# Altium PCB LM331MCU.PcbDoc
Units mil, origin at the board's own origin, x right, y up, seen from the top; angles counter-clockwise.
Board outline 6000 x 4000 mil, 2 copper layers (Top Layer, Bottom Layer); 22 components, 12 nets, 71 pads, 0 vias.
Unrouted connection lines stored in the file: 1.
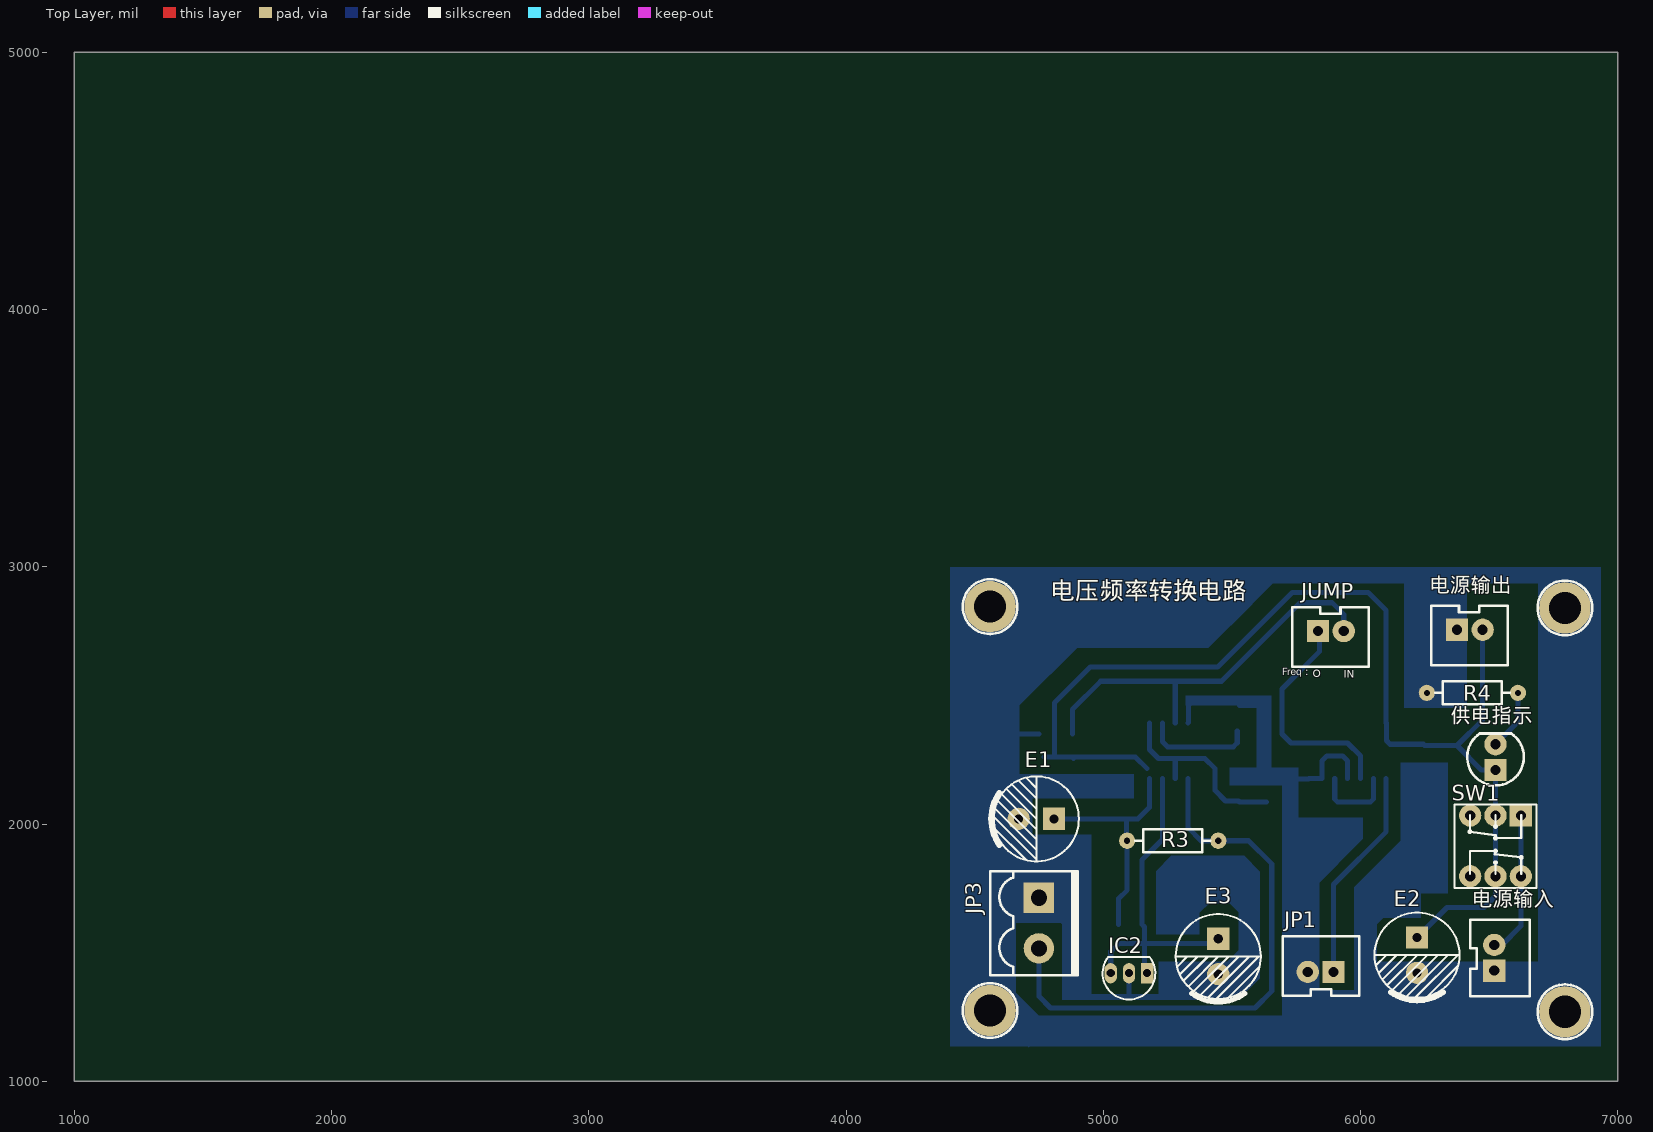
[diagram p0: Top Layer view]
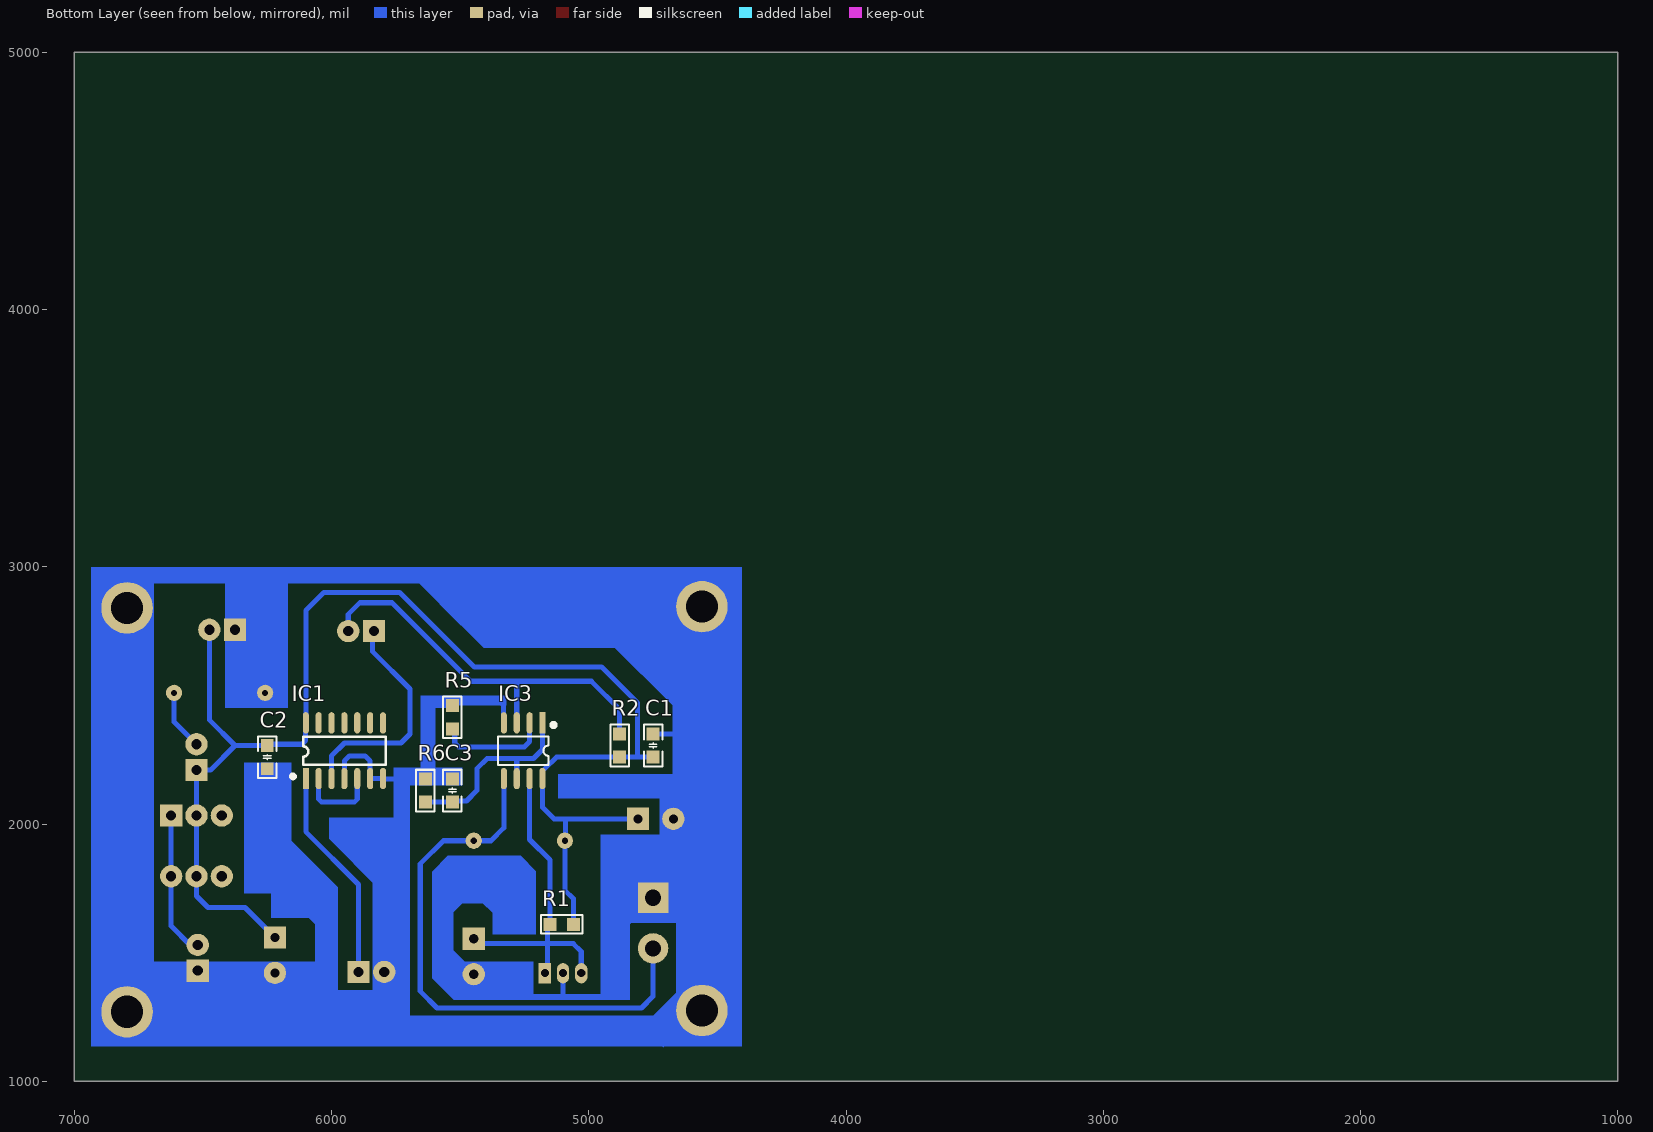
[diagram p1: Bottom Layer view, seen from below]

## Layer stack, top to bottom
Top Solder: solder mask 0.4, Solder Resist, Dk 3.5
Top Layer: signal copper 1.4
Dielectric 1: dielectric 12.6, FR-4, Dk 4.8
Bottom Layer: signal copper 1.4
Bottom Solder: solder mask 0.4, Solder Resist, Dk 3.5

## Board outline
1000,1000 7000,1000 7000,5000 1000,5000

## Design rules (kind name [scope] priority, off if disabled: settings)
Clearance [All] p1: gap=10 ignorepadtopadclearanceinfootprint=FALSE except(0: Arc-Hole Track-Hole SMDPad-Hole THPad-Hole Via-Hole Fill-Hole Poly-Hole Region-Hole Text-Hole)
PolygonConnect [All] p1: connectstyle=Relief reliefconductorwidth=10 reliefentries=4 polygonreliefangle="90 Angle" airgapwidth=10
RoutingVias [All] p1: holewidth=28 width=50 viastyle="Through Hole" minholewidth=28 minwidth=50 maxholewidth=28 maxwidth=50
SolderMaskExpansion [All] p1: expansion=4
Width [All] p1: maxlimit=39.37 minlimit=10 preferedwidth=31.5 toplayer_maxwidth=10 toplayer_prefwidth=10 bottomlayer_minwidth=19.68 minimp=50.000000 maximp=50.000000 favimp=50.000000
30 further rules are at their usual default settings.

## Components (designator, comment, footprint, x,y, rotation, side; value= is the part's Value field where it differs from the comment)
C1 "104" "C 0805_M" 4750,2305 r270 bottom
C2 "104" "C 0805_M" 6250,2260 r90 bottom
C3 "1n" "C 0805_M" 5530,2130 r270 bottom
E1 "220uF" "CAP 3.5*8*11.5" 4740,2020 r180 top
E2 "220uF" "CAP 3.5*8*11.5" 6220,1490 r270 top
E3 "100uF" "CAP 3.5*8*11.5" 5447.17,1485 r270 top
IC1 "CD4013" SOP14_M 5950,2285 r90 bottom
IC2 "TL431" TO92A 5100,1420 r90 top
IC3 "LM331" SOP8_M 5255,2285 r270 bottom
JP1 "HDR-1X2" XH2.54-LI-2P 5845,1425 r180 top
JP3 "HDR-1X2" KF2EDGK5.0-LI-2P 4750,1615 r270 top
JUMP "HDR-1X2" XH2.54-LI-2P 5885,2750 r0 top (schematic designator JP5)
R1 "4.7K" "R 0805_M" 5105,1610 r180 bottom
R2 "4.7K" "R 0805_M" 4880,2305 r270 bottom
R3 "51K" "RS 1/4W" 5270,1935 r180 top
R4 "1K" "RS 1/4W" 6435,2510 r0 top
R5 "4.7K" "R 0805_M" 5530,2415 r270 bottom
R6 "10K" "R 0805_M" 5635,2130 r270 bottom
SW1 "KET 8X8" "KFT DIP-8X8" 6525,1915 r180 top
供电指示 "红色" "LED 5MM-B" 6525,2260 r90 top (schematic designator LED1)
电源输入 "HDR-1X2" XH2.54-LI-2P 6520,1480 r90 top (schematic designator JP2)
电源输出 "HDR-1X2" XH2.54-LI-2P 6425,2755 r0 top (schematic designator JP4)

## Footprints (in the part's own frame and the unit in brackets; to place one, negate y for a bottom-side part, rotate by r counter-clockwise, add the part's x,y. Pads: shape width x height; smd on the part's side, far side on the other; paste and mask are expansions set on the pad)
"C 0805_M" [mil] "无极性贴片电容"
  rect 50x50 smd: 1(-45,0) 2(45,0)
  silkscreen extent -81,-36 81,36, body extent -39,-24 39,24, height 20
"CAP 3.5*8*11.5" [mm] "脚距3.5mm直径8mm高度11.5mm"
  rect 2.2x2.2 hole 0.9: 1(-1.75,0)
  round 2.2 hole 0.9: 2(1.75,0)
  silkscreen extent -4.2,-4.2 4.5,4.2, body extent -4,-4 4.01,4, height 11.53
KF2EDGK5.0-LI-2P [mm] "立插端子"
  rect 3x3 hole 1.6: 1(-2.5,0)
  round 3 hole 1.6: 2(2.5,0)
  silkscreen extent -5.12,-4.83 5.17,3.81, body extent -5.04,-4.75 5.04,3.75, height 11.25
"KFT DIP-8X8" [mm] "自锁开关，规格：8*8mm"
  rect 2.2x2.2 hole 1: 1(-2.5,-3)
  round 2.2 hole 1: 2(0,-3) 3(2.5,-3) 4(2.5,3) 5(0,3) 6(-2.5,3)
  silkscreen extent -4.06,-4.06 4.06,4.15, body extent -3.95,-3.95 4.05,4.05, height 13.1
"LED 5MM-B" [mm] "蓝色5mm直插LED"
  rect 2.2x2.2 hole 1: 1(-1.27,0)
  round 2.2 hole 1: 2(1.27,0)
  silkscreen extent -2.8,-2.8 2.33,2.8, body extent -2.85,-2.85 2.45,2.85, height 8.75
"R 0805_M" [mil] "1/8W贴片电阻"
  rect 50x50 smd: 1(-45,0) 2(45,0)
  silkscreen extent -81,-36 81,36, body extent -39,-25 39,25, height 20
"RS 1/4W" [mm] "直插色环电阻，脚距9mm，直径2.3mm"
  round 1.6 hole 0.6: 1(-4.5,0) 2(4.5,0)
  silkscreen extent -3.68,-1.14 3.68,1.14, body extent -4.72,-1.16 4.73,1.16, height 2.32
SOP8_M [mm] "5*6*1.8mm（长宽高）"
  rect 2.1x0.6 smd: 1(-2.75,1.905)
  oval 2.1x0.6 smd: 2(-2.75,0.635) 3(-2.75,-0.635) 4(-2.75,-1.905) 5(2.75,-1.905) 6(2.75,-0.635) 7(2.75,0.635) 8(2.75,1.905)
  silkscreen extent -2.69,-2.5 1.4,3.15, body extent -3,-2.5 3,2.5, height 1.9
SOP14_M [mm] "8.7*6.2*1.8mm（长宽高）"
  rect 2.1x0.6 smd: 1(-2.75,3.81)
  oval 2.1x0.6 smd: 2(-2.75,2.54) 3(-2.75,1.27) 4(-2.75,0) 5(-2.75,-1.27) 6(-2.75,-2.54) 7(-2.75,-3.81) 8(2.75,-3.81) 9(2.75,-2.54) 10(2.75,-1.27) 11(2.75,0) 12(2.75,1.27) 13(2.75,2.54) 14(2.75,3.81)
  silkscreen extent -2.67,-4.06 1.4,5.21, body extent -3,-4.35 3,4.35, height 1.9
TO92A [mm] "92晶体管"
  rect 2x1.2 hole 0.8: 1(0,-1.8)
  oval 2x1.2 hole 0.8: 2(0,0) 3(0,1.8)
  silkscreen extent -2.6,-2.6 1.6,2.6, body extent -2.3,-2.3 1.3,2.3, height 7.6
XH2.54-LI-2P [mm] "接插件，2P"
  rect 2.2x2.2 hole 1: 1(-1.27,0)
  round 2.2 hole 1: 2(1.27,0)
  silkscreen extent -3.81,-3.51 3.74,2.37, body extent -3.77,-3.3 3.77,2.4, height 7.05

## Part data
C1 C2 C3: library part C, "无极性贴片电容"
E1 E2 E3: library part C-CAP, "直插电解电容"
IC2: library part TL431-ID, "可调基准稳压芯片", BOM名称=¿Éµ÷»ù×, 学习资源=www.ooocke.
IC3: "频率电压转换器"
JP1 JP3 JUMP 电源输入 电源输出: library part "Header 2", "2P接插件", BOM名称=2P接, 学习资源=www.ooocke.
R1 R2 R5 R6: library part R, "贴片电阻"
R3 R4: library part R-CRR, "直插色环电阻"
SW1: "8*8自锁开关"
供电指示: library part LED-5MM, "5mm插件LED", BOM名称=5mm插件, 学习资源=www.ooocke.

## Free pads (board coordinates)
  round 200 hole 125: 2(4560,1275) 2(4560,2845) 2(6795,1270) 2(6795,2840)

## Nets (pads, with @x,y where several pads share a name; then routed paths per layer and width w, separated by ;. In a path a pad name is that pad's centre, name@x,y a point inside that pad or via, vN(x,y) a via of type N, cw(c..) or ccw(c..) an arc to the next point about the centre after c; other vN are vias at no path point)
1Q: IC1.1 JP1.1 | length 836.6
  Bottom Layer w19.68: JP1.1 5895,1765 6100,1970 IC1.1
cin: E3.1 IC2.1 IC2.3 IC3.7 R1.1 | length 1321.3
  Bottom Layer w19.68: IC2.3 5029.13,1504.13 5060,1535 5160.43,1535 ; IC2.1 5160.43,1430.43 5160.43,1535 ; IC3.7 5230,1940 5150,1860 R1.1 5160.43,1599.57 5160.43,1535 ; E3.1 5428.27,1535 5160.43,1535
F_O: IC3.3 JUMP.2 R2.1 | length 1567.3
  Bottom Layer w19.68: R2.1 4880,2445 4990,2555 5280,2555 ; IC3.3 5280,2555 ; JUMP.2 5935,2815 5890,2860 5765,2860 5460,2555 5280,2555
F_O_1: IC1.3 JUMP.1 | length 890.6
  Bottom Layer w19.68: JUMP.1 5840,2745 5840,2670 5695,2525 5695,2350 5730,2315 5950,2315 6000,2265 IC1.3
GND: C1.1 C2.1 C3.1 E1.2 E2.2 E3.2 IC1.4 IC1.6 IC1.7 IC2.2 IC3.4 JP1.2 JP3.1 pad.2 R4.1 R5.1 R6.1 电源输入.1 电源输出.1 | length 4838.8
  Bottom Layer w19.68: E1.2@4665,2020 4665,2350 C1.1 ; E1.2 4671.1,1792.32 JP3.1 4905,1558.43 4905,1360 4935,1330 ; 5100,1335 IC2.2@5100,1405 ; IC3.4 5330.75,2394.02 5330.75,2460.75 5360,2490 5510,2490 5530,2470 R5.1 5610,2460 5630,2440 R6.1@5630,2180 ; 5410,1330 5437.37,1357.37 5437.37,1406.31 E3.2 ; C3.1 R6.1 5798.27,2175 IC1.7 IC1.6 5850.75,2177.49 5850.75,2245.75 5870,2265 5930,2265 5949.25,2245.75 5949.25,2177.49 IC1.4 ; JP1.2 5795,1355 5825,1325 6185,1325 6216.14,1356.14 6216.14,1417.24 E2.2 电源输入.1@6541.1,1421.1 ; 6010,1335 6010,1570 6250,1810 C2.1 ; R4.1 6320,2510 6375,2565 电源输出.1
NetC3_2: C3.2 IC3.1 IC3.6 R6.2 | length 766.2
  Bottom Layer w19.68: IC3.1 5180,2290 5215,2255 5395,2255 5435,2215 5435,2130 5475.47,2089.53 5525.47,2089.53 C3.2 R6.2 ; IC3.6 5280,2250
NetIC1_2: IC1.2 IC1.5 | length 320
  Bottom Layer w19.68: IC1.5 5900,2096.53 5911.53,2085 6038.47,2085 6050,2096.53 IC1.2
NetIC3_2: IC3.2 R5.2 | length 424.4
  Bottom Layer w19.68: IC3.2 5230,2320 5250,2300 5505.47,2300 5520.94,2315.47 R5.2@5520.94,2360.95
NetLED1_2: R4.2 供电指示.2 | length 236.1
  Bottom Layer w19.68: 供电指示.2 6612.17,2397.17 R4.2
Ser_IN: IC3.5 JP3.2 R3.1 | length 2206.9
  Bottom Layer w19.68: JP3.2 4750,1330 4795,1285 5590,1285 5655,1350 5655,1845 5565,1935 R3.1 5380,1935 5330,1985 IC3.5
VCC: C1.2 C2.2 E1.1 E2.1 IC1.14 IC3.8 R1.2 R2.2 R3.2 SW1.2 SW1.4 SW1.5 供电指示.1 电源输出.2 | length 5390.1
  Bottom Layer w19.68: C1.2@4770,2260 4810,2260 ; E1.1 5090,2020 ; R2.2@4884.53,2255.47 R2.2 ; R1.2 5060,1710 5092.83,1742.83 R3.2 5090,1937.83 5090,2020 ; 5170.87,2215 5125.87,2260 R2.2 ; IC3.8 5180,2065 5135,2020 5090,2020 ; E2.1 6336.1,1675 6480,1675 6525,1720 SW1.5 SW1.2 供电指示.1 6470,2210 6375,2305 ; 电源输出.2 6475,2405 6375,2305 ; 4810,2260 4810,2470 4950,2610 5445,2610 5735,2900 6030,2900 6100,2830 IC1.14 6100.75,2392.51 6100.75,2324.25 6115,2310 6245,2310 C2.2 6375,2305 ; 4810,2260 R2.2
VCC_IN: SW1.1 SW1.6 电源输入.2 | length 533.5
  Bottom Layer w19.68: 电源输入.2@6550,1530 6623.43,1603.43 SW1.6 SW1.1
pads on no net: IC1.8 IC1.9 IC1.10 IC1.11 IC1.12 IC1.13 SW1.3

## Polygon pours and split planes (outlines as drawn)
no net on Bottom Layer "Bottom Layer-No Net" (solid, pour order 16): 5547.74,1877.26
no net on Bottom Layer "Bottom Layer-No Net 1" (solid, pour order 14): 5840,1535
no net on Bottom Layer "Bottom Layer-No Net 2" (solid, pour order 12): 5395,3385
no net on Bottom Layer "Bottom Layer-No Net 3" (solid, pour order 10): 5300,4740
no net on Bottom Layer "Bottom Layer-No Net 4" (solid, pour order 8): 5320,4360
no net on Bottom Layer "Bottom Layer-No Net 5" (solid, pour order 6): 4500,1825
no net on Bottom Layer "Bottom Layer-No Net 6" (solid, pour order 4): 5695,1560
no net on Bottom Layer "Bottom Layer-No Net 7" (solid, pour order 2): 5690,1480
no net on Bottom Layer "Bottom Layer-No Net 8" (solid, pour order 0): 6935,1135

## Other copper
Bottom Layer:
  rectangle net GND: 4650,2100 5120,2195
  region net GND: 5405.24,1776.18 5547.74,1633.68 5595.42,1681.37 5452.92,1823.87
  region net GND: 5348.08,1628.08 5440,1720 5376.36,1783.64 5284.44,1691.72
  region net GND: 5265,1877.26 5203.87,1816.13 5286.32,1733.68 5347.45,1794.81
  rectangle net GND: 5265,1790 5547.74,1877.26
  region net GND: 5610,1815 5547.74,1877.26 5466.42,1795.95 5528.68,1733.68
  rectangle net GND: 5205,1570 5375,1710
  rectangle net GND: 5205,1690 5610,1815
  rectangle net GND: 5525,1625 5610,1815
  region net GND: 5530,1515 5501.72,1486.72 5515.86,1472.57 5544.14,1500.86
  region net GND: 5512.74,1497.26 5427.74,1412.26 5525,1315 5610,1400
  region net GND: 5610,1400 5610,1671.47 5525.47,1671.47 5525.47,1400
  rectangle net GND: 4630,1796.89 4955,1960
  region net GND: 4523.68,1318.68 4711.18,1131.18 4792.5,1212.5 4605,1400
  region net GND: 4828.05,2861.95 4513.05,2546.95 4637.5,2422.5 4952.5,2737.5
  rectangle net GND: 5320,2460 5640,2500
  rectangle net GND: 5595,2205 5655,2500
  rectangle net GND: 5490,2150 5760,2220
  rectangle net GND: 5695,1970 5760,2175
  rectangle net GND: 4510,1195 4660,1645
  rectangle net GND: 4840,1315 5235,1340
  rectangle net GND: 5215,1315 5525,1465
  rectangle net GND: 5798.27,1910 5880,1980
  region net GND: 6010,2025 5744.83,2025 5744.83,1941.18 6010,1941.18
  region net GND: 5821.32,1753.68 6008.82,1941.18 5927.5,2022.5 5740,1835
  region net GND: 6056.32,1673.68 6243.82,1861.18 6162.5,1942.5 5975,1755
  rectangle net GND: 5695,1455 5840,2025
  region net GND: 5628.18,2903.18 5660,2935 5622.75,2972.25 5590.93,2940.43
  region net GND: 5545,2820 5630,2905 5540.75,2994.25 5455.75,2909.25
  region net GND: 5445,2990 5275,2820 5410,2685 5580,2855
  rectangle net GND: 6155,1825 6340,2240
  rectangle net GND: 6080,1730 6340,1835
  rectangle net GND: 5975,1635 6235,1755
  rectangle net GND: 5975,1335 6065,1695
  rectangle net GND: 6170,2450 6415,2980
  rectangle net GND: 4580,1955 4725,2120
  rectangle net GND: 4555,1800 4675,2750
  rectangle net GND: 4840,1320 4955,1820
  rectangle net GND: 4515,1615 4955,1825
  rectangle net GND: 6055,1260 6805,1465
  rectangle net GND: 5785,1185 6805,1355
  rectangle net GND: 5695,1180 5840,1560
  rectangle net GND: 5380,2935 6935,3000
  rectangle net GND: 4405,2685 5410,3000
  rectangle net GND: 4405,1135 4595,3000
  rectangle net GND: 4405,1135 6935,1255
  rectangle net GND: 6690,1135 6935,3000

## Silkscreen, mask and mechanical layers (free items; w line width, h text height)
Top Overlay:
  circle w10: c6795,2840 r106.3
  circle w10: c6795,1270 r106.3
  circle w10: c4560,1275 r106.3
  circle w10: c4560,2845 r106.3
  text "电压频率转换电路" at 4795,2850 h120
  text "Freq：" at 5695,2568.32 h50
  text "O" at 5815,2560 h50
  text "IN" at 5935,2559.45 h50
Mechanical 1:
  lines w39.37: 6930,1145 6935,1145 6935,3000 4405,3000 4405,1135 6935,1135